# Altium PCB V1_PCB.PcbDoc
Units mm, origin at the board's own origin, x right, y up, seen from the top; angles counter-clockwise.
Board outline 200 x 180 mm, 2 copper layers (Top Layer, Bottom Layer); 187 components, 113 nets, 632 pads, 16 vias.
Unrouted connection lines stored in the file: 383.
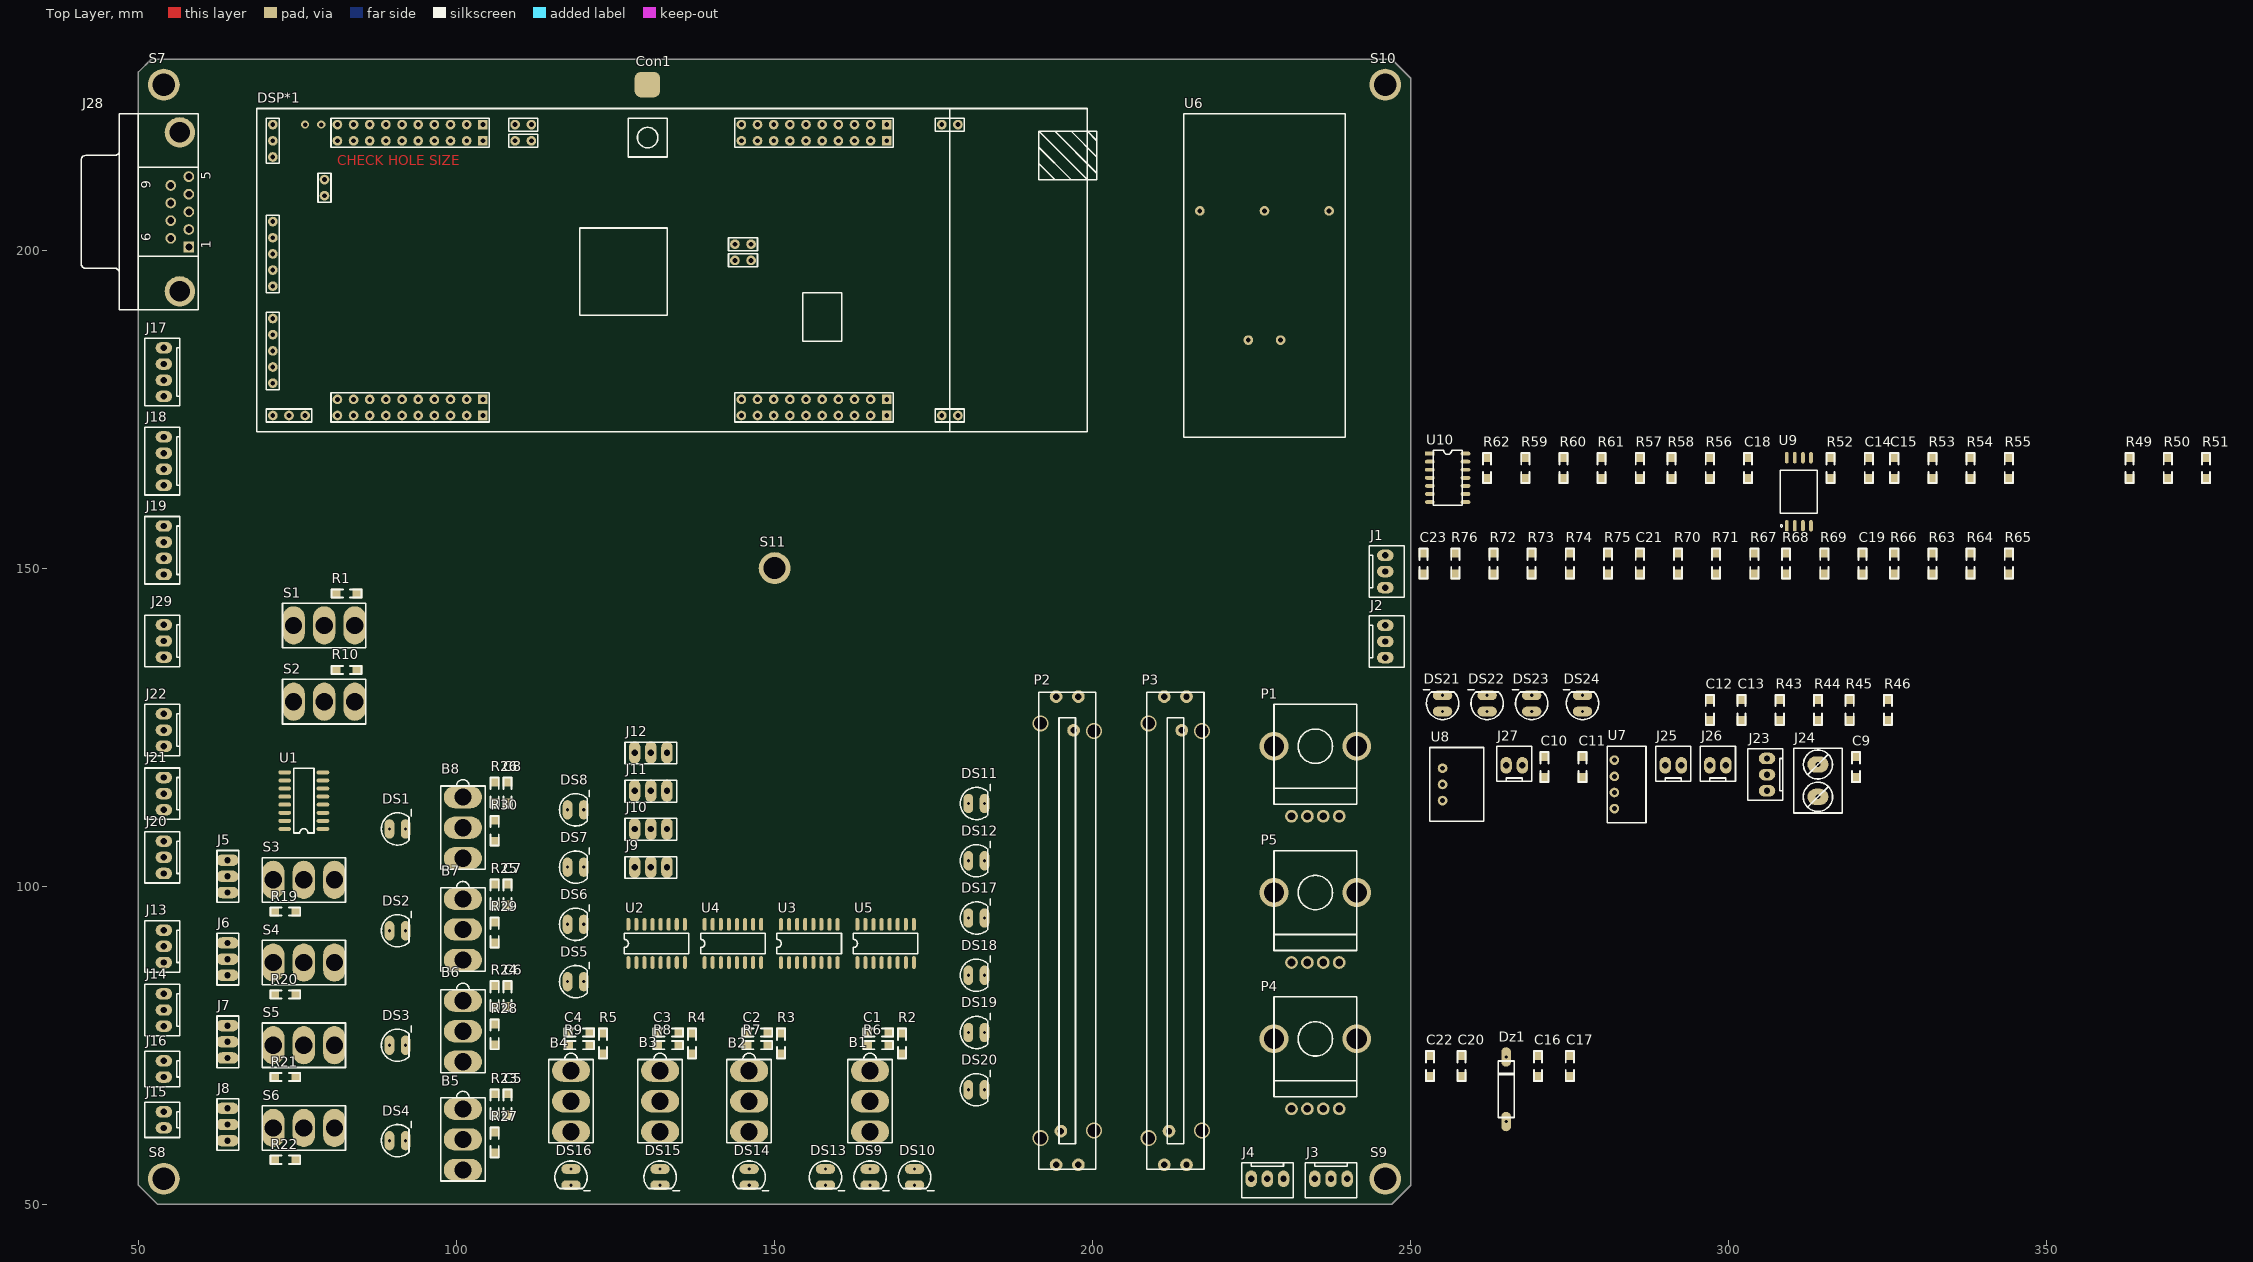
[diagram p0: Top Layer view]
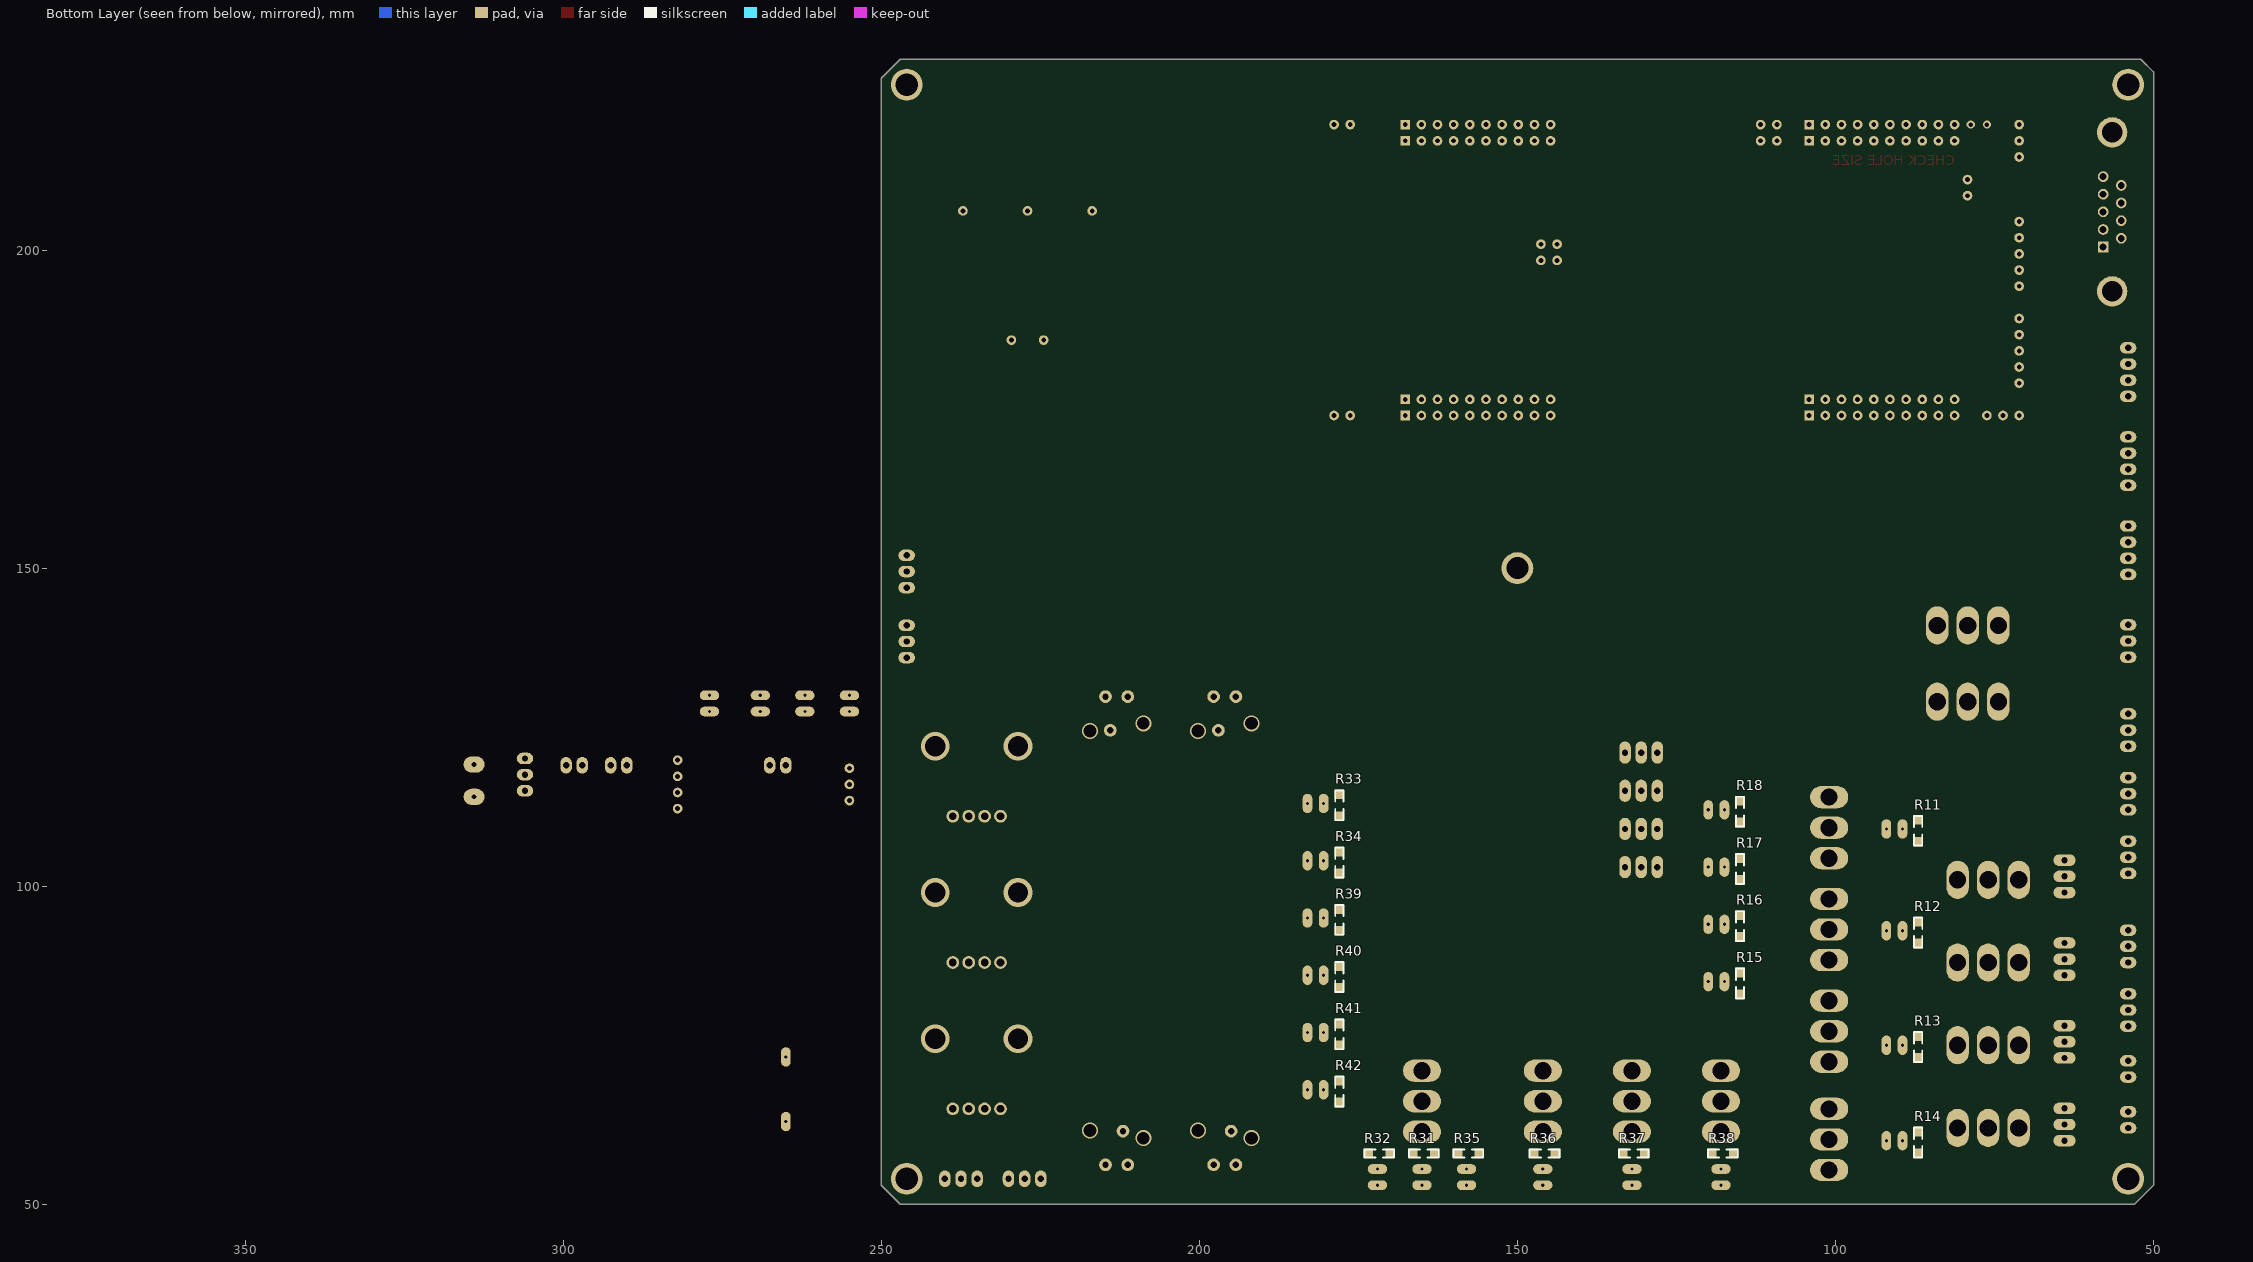
[diagram p1: Bottom Layer view, seen from below]

## Layer stack, top to bottom
Top Solder: solder mask 0.0102, Solder Resist, Dk 3.5
Top Layer: signal copper 0.0356
Dielectric 1: dielectric 0.32, FR-4, Dk 4.8
Bottom Layer: signal copper 0.0356
Bottom Solder: solder mask 0.0102, Solder Resist, Dk 3.5

## Board outline
53,50 247,50 250,53 250,227 247,230 52,230 50,228 50,53

## Design rules (kind name [scope] priority, off if disabled: settings)
Clearance [All] p1: gap=0.254
ComponentClearance [All] p1: gap=0.254 collisioncheckmode=3 verticalgap=5 showdistances=FALSE
PolygonConnect [All] p1: connectstyle=Relief reliefconductorwidth=0.254 reliefentries=4 polygonreliefangle="90 Angle" airgapwidth=0.254
RoutingVias [All] p1: holewidth=0.711 width=1.27 viastyle="Through Hole" minholewidth=0.711 minwidth=1.27 maxholewidth=0.711 maxwidth=1.27
SolderMaskExpansion [All] p1: expansion=0.102
Width [All] p1: maxlimit=0.254 minlimit=0.254 preferedwidth=0.254
29 further rules are at their usual default settings.

## Classes and differential pairs
component class Supplies: C9 C10 C11 C12 C13 DS21 DS22 DS23 DS24 DS? J23 J24 J25 J26 J27 J? R43 R44 R45 R46 R? U6 U7 U8 U?
component class InputsExtras: B5 B6 B7 B8 C5 C6 C7 C8 DS1 DS2 DS3 DS4 DS5 DS6 DS7 DS8 J5 J6 J7 J8 J9 J10 J11 J12 J13 J14 J15 J16 R11 R12 R13 R14 R15 R16 R17 R18 R19 R20 R21 R22 R23 R24 R25 R26 R27 R28 R29 R30 S3 S4 S5 S6 U1 U2
component class Inputs: B1 B2 B3 B4 C1 C2 C3 C4 J1 J2 J3 J4 P1 P2 P3 P4 P5 R1 R2 R3 R4 R5 R6 R7 R8 R9 R10 S1 S2
component class DSP: DSP*1
component class SignalProcessing: C14 C15 C16 C17 C18 C19 C20 C21 C22 C23 Dz1 J28 J29 R49 R50 R51 R52 R53 R54 R55 R56 R57 R58 R59 R60 R61 R62 R63 R64 R65 R66 R67 R68 R69 R70 R71 R72 R73 R74 R75 R76 U9 U10
component class Outputs: Con1 DS9 DS10 DS11 DS12 DS13 DS14 DS15 DS16 DS17 DS18 DS19 DS20 J17 J18 J19 J20 J21 J22 R31 R32 R33 R34 R35 R36 R37 R38 R39 R40 R41 R42 S7 S8 S9 S10 S11 U3 U4 U5

## Components (designator, comment, footprint, x,y, rotation, side; value= is the part's Value field where it differs from the comment)
B1 "Button_TH" ButtonTH 165,71 r270 top
B2 "Button_TH" ButtonTH 146,71 r270 top
B3 "Button_TH" ButtonTH 132,71 r270 top
B4 "Button_TH" ButtonTH 118,71 r270 top
B5 "Button_TH" ButtonTH 101,65 r270 top
B6 "Button_TH" ButtonTH 101,82 r270 top
B7 "Button_TH" ButtonTH 101,98 r270 top
B8 "Button_TH" ButtonTH 101,114 r270 top
C1 "nF" 1206 168,77 r180 top
C2 "nF" 1206 149,77 r180 top
C3 "nF" 1206 135,77 r180 top
C4 "nF" 1206 121,77 r180 top
C5 "nF" 1206 108,64 r90 top
C6 "nF" 1206 108,81 r90 top
C7 "nF" 1206 108,97 r90 top
C8 "nF" 1206 108,113 r90 top
C9 "100nF" 1206 320,117 r90 top
C10 "100nF" 1206 271,117 r90 top
C11 "100nF" 1206 277,117 r90 top
C12 "100nF" 1206 297,126 r90 top
C13 "100nF" 1206 302,126 r90 top
C14 "100nF" 1206 322,164 r90 top
C15 "100nF" 1206 326,164 r90 top
C16 "1uF" 1206 270,70 r90 top
C17 "100nF" 1206 275,70 r90 top
C18 "10nF" 1206 303,164 r90 top
C19 "100nF" 1206 321,149 r90 top
C20 "100nF" 1206 258,70 r90 top
C21 "100nF" 1206 286,149 r90 top
C22 "10nF" 1206 253,70 r90 top
C23 "100nF" 1206 252,149 r90 top
Con1 "CON1" ShortPad 130,226 r0 top
DS1 "Verde" "Led 3mm" 92,109 r270 top
DS2 "Verde" "Led 3mm" 92,93 r270 top
DS3 "Verde" "Led 3mm" 92,75 r270 top
DS4 "Verde" "Led 3mm" 92,60 r270 top
DS5 "Verde" "Led 3mm" 120,85 r270 top
DS6 "Verde" "Led 3mm" 120,94 r270 top
DS7 "Verde" "Led 3mm" 120,103 r270 top
DS8 "Verde" "Led 3mm" 120,112 r270 top
DS9 "Verde" "Led 3mm" 165,53 r180 top
DS10 "Verde" "Led 3mm" 172,53 r180 top
DS11 "Verde" "Led 3mm" 183,113 r270 top
DS12 "Verde" "Led 3mm" 183,104 r270 top
DS13 "Verde" "Led 3mm" 158,53 r180 top
DS14 "Verde" "Led 3mm" 146,53 r180 top
DS15 "Verde" "Led 3mm" 132,53 r180 top
DS16 "Verde" "Led 3mm" 118,53 r180 top
DS17 "Verde" "Led 3mm" 183,95 r270 top
DS18 "Verde" "Led 3mm" 183,86 r270 top
DS19 "Verde" "Led 3mm" 183,77 r270 top
DS20 "Verde" "Led 3mm" 183,68 r270 top
DS21 "Verde" "Led 3mm" 255,130 r0 top
DS22 "Verde" "Led 3mm" 262,130 r0 top
DS23 "Verde" "Led 3mm" 269,130 r0 top
DS24 "Verde" "Led 3mm" 277,130 r0 top
DSP*1 "F28069M_DevelopmentBoard" F28069M_DevelopmentBoard 167.64,219.71 r270 top
Dz1 "2.7V" Diodo 265,63 r90 top
J1 "Cleva 2 vias" Con3_KK_256 246,152 r270 top
J2 "Cleva 2 vias" Con3_KK_256 246,141 r270 top
J3 "Cleva 2 vias" Con3_KK_256 240,54 r180 top
J4 "Cleva 2 vias" Con3_KK_256 230,54 r180 top
J5 "Cleva 2 vias" con_3_100milis 64,99 r180 top
J6 "Cleva 2 vias" con_3_100milis 64,86 r180 top
J7 "Cleva 2 vias" con_3_100milis 64,73 r180 top
J8 "Cleva 2 vias" con_3_100milis 64,60 r180 top
J9 "Cleva 2 vias" con_3_100milis 128,103 r90 top
J10 "Cleva 2 vias" con_3_100milis 128,109 r90 top
J11 "Cleva 2 vias" con_3_100milis 128,115 r90 top
J12 "Cleva 2 vias" con_3_100milis 128,121 r90 top
J13 "Cleva 2 vias" Con3_KK_256 54,88 r90 top
J14 "Cleva 2 vias" Con3_KK_256 54,78 r90 top
J15 "Cleva 2 vias" Con2_KK_256 54,62 r90 top
J16 "Cleva 2 vias" Con2_KK_256 54,70 r90 top
J17 "Cleva 2 vias" Con4_KK_256 54,177 r90 top
J18 "Cleva 2 vias" Con4_KK_256 54,163 r90 top
J19 "Cleva 2 vias" Con4_KK_256 54,149 r90 top
J20 "Cleva 2 vias" Con3_KK_256 54,102 r90 top
J21 "Cleva 2 vias" Con3_KK_256 54,112 r90 top
J22 "Cleva 2 vias" Con3_KK_256 54,122 r90 top
J23 "Cur_meas_con" Con3_KK_256 306,115 r90 top
J24 "Cleva 2 vias" Clema_2_vias 314,114 r90 top
J25 "Cleva 2 vias" Con2_KK_256 290,119 r0 top
J26 "Cleva 2 vias" Con2_KK_256 297,119 r0 top
J27 "Cleva 2 vias" Con2_KK_256 265,119 r0 top
J28 "D Connector 9" DSUB1.385-2H9 47,206 r90 top
J29 "Cleva 2 vias" Con3_KK_256 54,136 r90 top
P1 "POT" POT_RK11K1140A3L 235,111 r0 top
P2 "POT" SliderPot_PTA6044 196,93 r270 top
P3 "POT" SliderPot_PTA6044 213,93 r270 top
P4 "POT" POT_RK11K1140A3L 235,65 r0 top
P5 "POT" POT_RK11K1140A3L 235,88 r0 top
R1 "RK" 1206 81,146 r0 top
R2 "RK" 1206 170,77 r270 top
R3 "RK" 1206 151,77 r270 top
R4 "RK" 1206 137,77 r270 top
R5 "RK" 1206 123,77 r270 top
R6 "RK" 1206 168,75 r180 top
R7 "RK" 1206 149,75 r180 top
R8 "RK" 1206 135,75 r180 top
R9 "RK" 1206 121,75 r180 top
R10 "RK" 1206 81,134 r0 top
R11 "RK" 1206 87,107 r90 bottom
R12 "RK" 1206 87,91 r90 bottom
R13 "RK" 1206 87,73 r90 bottom
R14 "RK" 1206 87,58 r90 bottom
R15 "RK" 1206 115,83 r90 bottom
R16 "RK" 1206 115,92 r90 bottom
R17 "RK" 1206 115,101 r90 bottom
R18 "RK" 1206 115,110 r90 bottom
R19 "RK" 1206 74.8,96 r180 top
R20 "RK" 1206 74.8,83 r180 top
R21 "RK" 1206 74.8,70 r180 top
R22 "RK" 1206 74.8,57 r180 top
R23 "RK" 1206 106,64 r90 top
R24 "RK" 1206 106,81 r90 top
R25 "RK" 1206 106,97 r90 top
R26 "RK" 1206 106,113 r90 top
R27 "RK" 1206 106,58 r90 top
R28 "RK" 1206 106,75 r90 top
R29 "RK" 1206 106,91 r90 top
R30 "RK" 1206 106,107 r90 top
R31 "RK" 1206 163,58 r0 bottom
R32 "RK" 1206 170,58 r0 bottom
R33 "RK" 1206 178,111 r90 bottom
R34 "RK" 1206 178,102 r90 bottom
R35 "RK" 1206 156,58 r0 bottom
R36 "RK" 1206 144,58 r0 bottom
R37 "RK" 1206 130,58 r0 bottom
R38 "RK" 1206 116,58 r0 bottom
R39 "RK" 1206 178,93 r90 bottom
R40 "RK" 1206 178,84 r90 bottom
R41 "RK" 1206 178,75 r90 bottom
R42 "RK" 1206 178,66 r90 bottom
R43 "65R" 1206 308,126 r90 top
R44 "150R" 1206 314,126 r90 top
R45 "150R" 1206 319,126 r90 top
R46 "650R" 1206 325,126 r90 top
R49 "1k" 1206 363,164 r90 top
R50 "1k" 1206 369,164 r90 top
R51 "1k" 1206 375,164 r90 top
R52 "21.5k" 1206 316,164 r90 top
R53 "1.78k" 1206 332,164 r90 top
R54 "1.78k" 1206 338,164 r90 top
R55 "1.78k" 1206 344,164 r90 top
R56 "1k" 1206 297,164 r90 top
R57 "10k" 1206 286,164 r90 top
R58 "10k" 1206 291,164 r90 top
R59 "16.2k" 1206 268,164 r90 top
R60 "16.2k" 1206 274,164 r90 top
R61 "8.2k" 1206 280,164 r90 top
R62 "1k" 1206 262,164 r90 top
R63 "10k" 1206 332,149 r90 top
R64 "10k" 1206 338,149 r90 top
R65 "2.61k" 1206 344,149 r90 top
R66 "9.09R" 1206 326,149 r90 top
R67 "10k" 1206 304,149 r90 top
R68 "10k" 1206 309,149 r90 top
R69 "2.61k" 1206 315,149 r90 top
R70 "61.9k" 1206 292,149 r90 top
R71 "9.09R" 1206 298,149 r90 top
R72 "12.1k" 1206 263,149 r90 top
R73 "10k" 1206 269,149 r90 top
R74 "10k" 1206 275,149 r90 top
R75 "2.61k" 1206 281,149 r90 top
R76 "9.09R" 1206 257,149 r90 top
S1 "Switch" SwitchTH_2Pos 84,141 r180 top
S2 "Switch" SwitchTH_2Pos 84,129 r180 top
S3 "Switch" SwitchTH_2Pos 80.8,101 r180 top
S4 "Switch" SwitchTH_2Pos 80.8,88 r180 top
S5 "Switch" SwitchTH_2Pos 80.8,75 r180 top
S6 "Switch" SwitchTH_2Pos 80.8,62 r180 top
S7 "Support" Support 54,226 r0 top
S8 "Support" Support 54,54 r0 top
S9 "Support" Support 246,54 r0 top
S10 "Support" Support 246,226 r0 top
S11 "Support" Support 150,150 r0 top
U1 "MMPQ3904" SO-16 79,109 r180 top
U2 "MMPQ3904" SO-16 127,88 r90 top
U3 "MMPQ3904" SO-16 151,88 r90 top
U4 "MMPQ3904" SO-16 139,88 r90 top
U5 "MMPQ3904" SO-16 163,88 r90 top
U6 "TEL15-2423" TEL15-2423 227,196 r90 top
U7 "CRE1S0505" CRE1S0505SC 282,116 r90 top
U8 "TSR 1-2450" "TSR 1-2450" 255,116 r90 top
U9 "ACPL-C870-000E" SOIC127P1150X360-8N 311,162 r90 top
U10 "LM324" SOIC_14 253,168 r0 top

## Footprints (in the part's own frame and the unit in brackets; to place one, negate y for a bottom-side part, rotate by r counter-clockwise, add the part's x,y. Pads: shape width x height; smd on the part's side, far side on the other; paste and mask are expansions set on the pad)
1206 [mil] "SMD R&C"
  rect 60x60 smd: 1(0,0) 2(135,0)
  silkscreen extent -25,-25 160,25, body extent 2,-31 128,31
ButtonTH [mm]
  oval 3.5x6 hole 2.7: 0(0,0) 1(4.8,0) 2(9.6,0)
  silkscreen extent -2.75,-3.5 11.35,3.5
Clema_2_vias [mil] "Conector 2 vias"
  oval 100x130 hole 30: 1(1.97,0) 2(201.97,0)
  silkscreen extent -98,-150 302,150
Con2_KK_256 [mm]
  oval 1.8x2.6 hole 1: 1(0,0) 2(2.54,0)
  silkscreen extent -1.5,-2.5 4.04,3
Con3_KK_256 [mm]
  oval 1.8x2.6 hole 1: 1(0,0) 2(2.54,0) 3(5.08,0)
  silkscreen extent -1.5,-2.5 6.58,3
Con4_KK_256 [mm]
  oval 1.8x2.6 hole 1: 1(0,0) 2(2.54,0) 3(5.08,0) 4(7.62,0)
  silkscreen extent -1.5,-2.5 9.12,3
con_3_100milis [mm]
  oval 3.5x1.8 hole 1: 1(0,0) 2(0,-2.54) 3(0,-5.08)
  silkscreen extent -1.78,-6.6 1.65,1.52
CRE1S0505SC [mil]
  round 60 hole 30: 1(-150,0) 2(-50,0) 3(50,0) 4(150,0)
  silkscreen extent -237,-196 237,44
Diodo [mil] "Diodo"
  oval 120x60 hole 20: A(0,0) K(400,0)
  silkscreen extent 25,-50 375,50
DSUB1.385-2H9 [mm] "Connector; D Subminiature; 9 Position; Right Angle; Pitch 1.385 mm"
  rect 1.69x1.69 hole 1.09: 1(-5.54,-10.92)
  round 1.69 hole 1.09: 2(-2.77,-10.92) 3(0,-10.92) 4(2.77,-10.92) 5(5.54,-10.92) 6(-4.155,-8.08) 7(-1.385,-8.08) 8(1.385,-8.08) 9(4.155,-8.08)
  round 4.76 hole 3.26: 10(-12.495,-9.5) 11(12.495,-9.5)
  silkscreen extent -15.4,-12.4 15.4,6
F28069M_DevelopmentBoard [mil]
  rect 60x60 hole 30: 1(0,0) 20(1800,0) 21(100,0) 40(1700,0) 41(0,-2500) 60(1800,-2500) 61(100,-2500) 80(1700,-2500)
  round 60 hole 30: 2(0,-100) 3(0,-200) 4(0,-300) 5(0,-400) 6(0,-500) 7(0,-600) 8(0,-700) 9(0,-800) 10(0,-900) 11(1800,-900) 12(1800,-800) 13(1800,-700) 14(1800,-600) 15(1800,-500) 16(1800,-400) 17(1800,-300) 18(1800,-200) 19(1800,-100) 22(100,-100) 23(100,-200) 24(100,-300) 25(100,-400) 26(100,-500) 27(100,-600) 28(100,-700) 29(100,-800) 30(100,-900) 31(1700,-900) 32(1700,-800) 33(1700,-700) 34(1700,-600) 35(1700,-500) 36(1700,-400) 37(1700,-300) 38(1700,-200) 39(1700,-100) 42(0,-2600) 43(0,-2700) 44(0,-2800) 45(0,-2900) 46(0,-3000) 47(0,-3100) 48(0,-3200) 49(0,-3300) 50(0,-3400) 51(1800,-3400) 52(1800,-3300) 53(1800,-3200) 54(1800,-3100) 55(1800,-3000) 56(1800,-2900) 57(1800,-2800) 58(1800,-2700) 59(1800,-2600) 62(100,-2600) 63(100,-2700) 64(100,-2800) 65(100,-2900) 66(100,-3000) 67(100,-3100) 68(100,-3200) 69(100,-3300) 70(100,-3400) 71(1700,-3400) 72(1700,-3300) 73(1700,-3200) 74(1700,-3100) 75(1700,-3000) 76(1700,-2900) 77(1700,-2800) 78(1700,-2700) 79(1700,-2600) 81(1800,-3600) 82(1800,-3700) 83(1800,-3800) 84(1600,-3800) 85(1500,-3800) 86(1400,-3800) 87(1300,-3800) 88(1200,-3800) 89(1000,-3800) 90(900,-3800) 91(800,-3800) 92(700,-3800) 93(600,-3800) 94(200,-3800) 95(100,-3800) 96(0,-3800) 97(1800,340) 98(1800,440) 99(0,340) 100(0,440) 101(0,-2300) 102(0,-2200) 103(100,-2300) 104(100,-2200) 105(740,-940) 106(740,-840) 107(840,-940) 108(840,-840) 109(340,-3480) 110(440,-3480)
  silkscreen extent -100,-3900 1900,1300
"Led 3mm" [mil] "no está modificado"
  oval 120x60 hole 20: A(0,-100) K(0,0)
  silkscreen extent -120,-150 100,35
POT_RK11K1140A3L [mm]
  round 2 hole 1.2: 1(-3.75,0) 2(-1.25,0) 3(1.25,0) ""(3.75,0)
  silkscreen extent -6.5,1.9 6.5,17.6
ShortPad [mm]
  rrect50% 4x4 smd: 1(0,0)
SliderPot_PTA6044 [mm]
  round 2 hole 1: 1(-36.8,1.75) 1'(-36.8,-1.75) 2(-31.5,1) 2'(31.5,-1) 3(36.8,1.75) 3'(36.8,-1.75)
  silkscreen extent -37.5,-4.5 37.5,4.5
SO-16 [mm]
  oval 2x0.635 smd: 1(0,0) 2(0,-1.27) 3(0,-2.54) 4(0,-3.81) 5(0,-5.08) 6(0,-6.35) 7(0,-7.62) 8(0,-8.89) 9(6,-8.89) 10(6,-7.62) 11(6,-6.35) 12(6,-5.08) 13(6,-3.81) 14(6,-2.54) 15(6,-1.27) 16(6,0)
  silkscreen extent 1.4,-9.53 4.6,0.64
SOIC127P1150X360-8N [mm]
  oval 1.8x0.6 smd: 1(-5.35,1.905) 2(-5.35,0.635) 3(-5.35,-0.635) 4(-5.35,-1.905) 5(5.35,-1.905) 6(5.35,-0.635) 7(5.35,0.635) 8(5.35,1.905)
  silkscreen extent -5.54,-2.93 3.4,2.93
SOIC_14 [mil]
  rect 60x24 smd: 1(0,0)
  oval 60x24 smd: 2(0,-50) 3(0,-100) 4(0,-150) 5(0,-200) 6(0,-250) 7(0,-300) 8(220.47,-300) 9(220.47,-250) 10(220.47,-200) 11(220.47,-150) 12(220.47,-100) 13(220.47,-50) 14(220.47,0)
  silkscreen extent 20,-320 201,20
Support [mm]
  round 5 hole 3.5: ""(0,0)
SwitchTH_2Pos [mm]
  oval 3.5x6 hole 2.7: 0(0,0) 1(4.8,0) 2(9.6,0)
  silkscreen extent -1.75,-3.5 11.35,3.5
TEL15-2423 [mil]
  round 60 hole 30: 1(-400,100) 2(-400,-100) 3(400,-400) 4(400,0) 5(400,400)
  silkscreen extent -1000,-500 1000,500
"TSR 1-2450" [mil]
  round 60 hole 30: 1(-100,0) 2(0,0) 3(100,0)
  silkscreen extent -228,-256 228,79

## Part data
C1 C2 C3 C4 C5 C6 C7 C8 C9 C10 C11 C12 C13 C14 C15 C16 C17 C18 C19 C20 C21 C22 C23: library part Condensador, "Condensador"
DS1 DS2 DS3 DS4 DS5 DS6 DS7 DS8 DS9 DS10 DS11 DS12 DS13 DS14 DS15 DS16 DS17 DS18 DS19 DS20 DS21 DS22 DS23 DS24: library part Led
Dz1: library part Zener
J1 J2 J3 J4 J5 J6 J7 J8 J9 J10 J11 J12 J13 J14 J20 J21 J22 J23 J29: library part Con_3
J15 J16 J24 J25 J26 J27: library part Con_2
J17 J18 J19: library part Con_4
J28: "Receptacle Assembly, 9 Position, Right Angle"
P1 P2 P3 P4 P5: "POTENCIOMETRO"
R1 R2 R3 R4 R5 R6 R7 R8 R9 R10 R11 R12 R13 R14 R15 R16 R17 R18 R19 R20 R21 R22 R23 R24 R25 R26 R27 R28 R29 R30 R31 R32 R33 R34 R35 R36 R37 R38 R39 R40 R41 R42 R43 R44 R45 R46 R49 R50 R51 R52 R53 R54 R55 R56 R57 R58 R59 R60 R61 R62 R63 R64 R65 R66 R67 R68 R69 R70 R71 R72 R73 R74 R75 R76: library part Resistencia, "Resistencia"
U9: "Isolation Amplifier [Broadcom] ACPL-C870-000E Isolation Amplifier"
U10: library part LMC6484IM_1, "14 pin CMOS Quad Rail to Rail Input and Output Operational Amplifier 55 per tube"

## Via types
v1: diameter 2.5, hole 2, Top Layer to Bottom Layer, 8 vias
v2: diameter 4.5, hole 3.2, Top Layer to Bottom Layer, 6 vias
v3: diameter 1.27, hole 0.711, Top Layer to Bottom Layer, 2 vias

## Nets (pads, with @x,y where several pads share a name; then routed paths per layer and width w, separated by ;. In a path a pad name is that pad's centre, name@x,y a point inside that pad or via, vN(x,y) a via of type N, cw(c..) or ccw(c..) an arc to the next point about the centre after c; other vN are vias at no path point)
3.3V: B5.1 B6.1 B7.1 B8.1 J13.1 J14.1 J15.2 J16.2 R43.1 S3.2 S4.2 S5.2 S6.2
5V: C10.2 C13.1 C14.1 C16.1 C17.1 J1.1 J2.1 J24.1 J28.6 R11.1 R12.1 R13.1 R14.1 R15.1 R16.1 R17.1 R18.1 R31.1 R32.1 R33.1 R34.1 R35.1 R36.1 R37.1 R38.1 R39.1 R40.1 R41.1 R42.1 R44.1 U7.2 U8.3 U9.8
5V_PS: C11.2 C15.1 R45.1 U7.4 U9.1
15V: C20.1 U10.4
24V: C9.1 C12.1 J17.3 J18.3 J19.3 J25.1 J27.1 R61.1 R70.2 U6.1 U8.1
36V: J26.1 R52.1
+15V: J23.3 R46.1 U6.3
-15V: C20.2 J23.2 U6.5 U10.11
COM: DS24.K U6.4
GND: C1.2 C2.2 C3.2 C4.2 C5.1 C6.1 C7.1 C8.1 C9.2 C10.1 C12.2 C13.2 C14.2 C16.2 C17.2 C19.2 C21.2 C22.2 C23.2 Con1.1 DS21.K DS22.K DSP*1.22 J1.3 J2.3 J3.3 J4.3 J13.3 J14.3 J17.4 J18.4 J19.4 J20.3 J21.3 J22.3 J23.1 J24.2 J25.2 J27.2 J28.1 J28.10 J28.11 P1.3 P2.3 P3.3 P4.3 P5.3 R6.2 R7.2 R8.2 R9.2 R27.1 R28.1 R29.1 R30.1 R53.1 R54.1 R55.1 R59.2 R62.2 R66.2 R71.2 R72.1 R76.2 S1.0 S2.0 S3.0 S4.0 S5.0 S6.0 U1.10 U1.12 U1.14 U1.16 U2.10 U2.12 U2.14 U2.16 U3.10 U3.12 U3.14 U3.16 U4.10 U4.12 U4.14 U4.16 U5.10 U5.12 U5.14 U5.16 U6.2 U7.1 U8.2 U9.5
GND_PS: C11.1 C15.2 C18.2 DS23.K J26.2 R56.2 U7.3 U9.3 U9.4
NetB1_1: B1.1 R2.2 R6.1
NetB2_1: B2.1 R3.2 R7.1
NetB3_1: B3.1 R4.2 R8.1
NetB4_1: B4.1 R5.2 R9.1
NetB5_0: B5.0 J15.1 R23.1 R27.2
NetB6_0: B6.0 J16.1 R24.1 R28.2
NetB7_0: B7.0 R25.1 R29.2
NetB8_0: B8.0 R26.1 R30.2
NetC1_1: C1.1 C2.1 C3.1 C4.1 J1.2 J2.2 J3.2 J4.2 J5.2 J6.2 J7.2 J8.2 J9.2 J10.2 J11.2 J12.2 J17.1 J17.2 J18.1 J18.2 J19.1 J19.2 J20.2 J21.2 J22.2 P1.2 P2.2 P3.2 P4.2 P5.2 R1.2 R2.1 R3.1 R4.1 R5.1 R10.2 U3.9 U3.11 U3.13 U3.15 U4.9 U4.11 U4.13 U4.15 U5.9 U5.11 U5.13 U5.15
NetC5_2: C5.2 J9.1 R23.2
NetC6_2: C6.2 J10.1 R24.2
NetC7_2: C7.2 J11.1 R25.2
NetC8_2: C8.2 J12.1 R26.2
NetC18_1: C18.1 R52.2 R56.1 U9.2
NetC19_1: C19.1 R65.2
NetC21_1: C21.1 R69.2
NetC22_1: C22.1 R70.1 R72.2 U10.5 U10.10 U10.12
NetC23_1: C23.1 R75.2
NetDS1_A: DS1.A R11.2
NetDS1_K: DS1.K U1.7 U1.8
NetDS2_A: DS2.A R12.2
NetDS2_K: DS2.K U1.5 U1.6
NetDS3_A: DS3.A R13.2
NetDS3_K: DS3.K U1.3 U1.4
NetDS4_A: DS4.A R14.2
NetDS4_K: DS4.K U1.1 U1.2
NetDS5_A: DS5.A R15.2
NetDS5_K: DS5.K U2.7 U2.8
NetDS6_A: DS6.A R16.2
NetDS6_K: DS6.K U2.5 U2.6
NetDS7_A: DS7.A R17.2
NetDS7_K: DS7.K U2.3 U2.4
NetDS8_A: DS8.A R18.2
NetDS8_K: DS8.K U2.1 U2.2
NetDS9_A: DS9.A R31.2
NetDS9_K: DS9.K U3.7 U3.8
NetDS10_A: DS10.A R32.2
NetDS10_K: DS10.K U3.5 U3.6
NetDS11_A: DS11.A R33.2
NetDS11_K: DS11.K U3.3 U3.4
NetDS12_A: DS12.A R34.2
NetDS12_K: DS12.K U3.1 U3.2
NetDS13_A: DS13.A R35.2
NetDS13_K: DS13.K U4.7 U4.8
NetDS14_A: DS14.A R36.2
NetDS14_K: DS14.K U4.5 U4.6
NetDS15_A: DS15.A R37.2
NetDS15_K: DS15.K U4.3 U4.4
NetDS16_A: DS16.A R38.2
NetDS16_K: DS16.K U4.1 U4.2
NetDS17_A: DS17.A R39.2
NetDS17_K: DS17.K U5.7 U5.8
NetDS18_A: DS18.A R40.2
NetDS18_K: DS18.K U5.5 U5.6
NetDS19_A: DS19.A R41.2
NetDS19_K: DS19.K U5.3 U5.4
NetDS20_A: DS20.A R42.2
NetDS20_K: DS20.K U5.1 U5.2
NetDS21_A: DS21.A R43.2
NetDS22_A: DS22.A R44.2
NetDS23_A: DS23.A R45.2
NetDS24_A: DS24.A R46.2
NetJ5_1: J5.1 R19.2
NetJ5_3: J5.3 U1.9
NetJ6_1: J6.1 R20.2
NetJ6_3: J6.3 U1.11
NetJ7_1: J7.1 R21.2
NetJ7_3: J7.3 U1.13
NetJ8_1: J8.1 R22.2
NetJ8_3: J8.3 U1.15
NetJ9_3: J9.3 U2.9
NetJ10_3: J10.3 U2.11
NetJ11_3: J11.3 U2.13
NetJ12_3: J12.3 U2.15
NetJ13_2: J13.2 R19.1 S3.1
NetJ14_2: J14.2 R20.1 S4.1
NetJ28_2: J28.2 R50.2
NetJ28_3: J28.3 R51.2
NetJ28_9: J28.9 R49.2
NetJ29_1: J29.1 R73.1 R76.1
NetJ29_2: J29.2 R67.1 R71.1
NetJ29_3: J29.3 R63.1 R66.1
NetR1_1: R1.1 S1.1
NetR10_1: R10.1 S2.1
NetR21_1: R21.1 S5.1
NetR22_1: R22.1 S6.1
NetR49_1: R49.1 R53.2
NetR50_1: R50.1 R54.2
NetR51_1: R51.1 R55.2
NetR57_1: R57.1 U9.7
NetR57_2: R57.2 R59.1 U10.3
NetR58_1: R58.1 R60.1 U10.2
NetR58_2: R58.2 U9.6
NetR60_2: R60.2 U10.1
NetR61_2: R61.2 R62.1
NetR63_2: R63.2 R64.1 U10.6
NetR64_2: R64.2 R65.1 U10.7
NetR67_2: R67.2 R68.1 U10.9
NetR68_2: R68.2 R69.1 U10.8
NetR73_2: R73.2 R74.1 U10.13
NetR74_2: R74.2 R75.1 U10.14
VCC: B1.0 B2.0 B3.0 B4.0 DSP*1.41 J3.1 J4.1 J20.1 J21.1 J22.1 P1.1 P2.1 P3.1 P4.1 P5.1 S1.2 S2.2
pads on no net: B1.2 B2.2 B3.2 B4.2 B5.2 B6.2 B7.2 B8.2 DSP*1.1 DSP*1.2 DSP*1.3 DSP*1.4 DSP*1.5 DSP*1.6 DSP*1.7 DSP*1.8 DSP*1.9 DSP*1.10 DSP*1.11 DSP*1.12 DSP*1.13 DSP*1.14 DSP*1.15 DSP*1.16 DSP*1.17 DSP*1.18 DSP*1.19 DSP*1.20 DSP*1.21 DSP*1.23 DSP*1.24 DSP*1.25 DSP*1.26 DSP*1.27 DSP*1.28 DSP*1.29 DSP*1.30 DSP*1.31 DSP*1.32 DSP*1.33 DSP*1.34 DSP*1.35 DSP*1.36 DSP*1.37 DSP*1.38 DSP*1.39 DSP*1.40 DSP*1.42 DSP*1.43 DSP*1.44 DSP*1.45 DSP*1.46 DSP*1.47 DSP*1.48 DSP*1.49 DSP*1.50 DSP*1.51 DSP*1.52 DSP*1.53 DSP*1.54 DSP*1.55 DSP*1.56 DSP*1.57 DSP*1.58 DSP*1.59 DSP*1.60 DSP*1.61 DSP*1.62 DSP*1.63 DSP*1.64 DSP*1.65 DSP*1.66 DSP*1.67 DSP*1.68 DSP*1.69 DSP*1.70 DSP*1.71 DSP*1.72 DSP*1.73 DSP*1.74 DSP*1.75 DSP*1.76 DSP*1.77 DSP*1.78 DSP*1.79 DSP*1.80 DSP*1.81 DSP*1.82 DSP*1.83 DSP*1.84 DSP*1.85 DSP*1.86 DSP*1.87 DSP*1.88 DSP*1.89 DSP*1.90 DSP*1.91 DSP*1.92 DSP*1.93 DSP*1.94 DSP*1.95 DSP*1.96 DSP*1.97 DSP*1.98 DSP*1.99 DSP*1.100 DSP*1.101 DSP*1.102 DSP*1.103 DSP*1.104 DSP*1.105 DSP*1.106 DSP*1.107 DSP*1.108 DSP*1.109 DSP*1.110 Dz1.A Dz1.K J28.4 J28.5 J28.7 J28.8 P1. P2.1' P2.2' P2.3' P3.1' P3.2' P3.3' P4. P5. S7. S8. S9. S10. S11.
copper on no net:
  other v1: 191.8,60.4 208.8,60.4 200.2,61.6 217.2,61.6 200.2,124.4 217.2,124.4 191.8,125.6 208.8,125.6
  other v2: 228.5,76 241.5,76 228.5,99 241.5,99 228.5,122 241.5,122
  other v3: 76.2,219.71 78.74,219.71

## Other copper
Top Layer:
  text "CHECK HOLE SIZE" at 81.28,213.36 h1.52

## Text inside footprints (layer, text, board x,y; h text height)
J28: Top Overlay "6" at 51.975,201.345 h1.5 r90; Top Overlay "9" at 51.975,209.655 h1.5 r90; Top Overlay "5" at 61.375,211.04 h1.5 r90; Top Overlay "1" at 61.375,200.21 h1.5 r90